# Altium PCB DriveMotorEncoderBoard.PcbDoc
Units mil, origin at the board's own origin, x right, y up, seen from the top; angles counter-clockwise.
Board outline 1000 x 900 mil, 2 copper layers (Top Layer, Bottom Layer); 11 components, 9 nets, 35 pads, 6 vias.
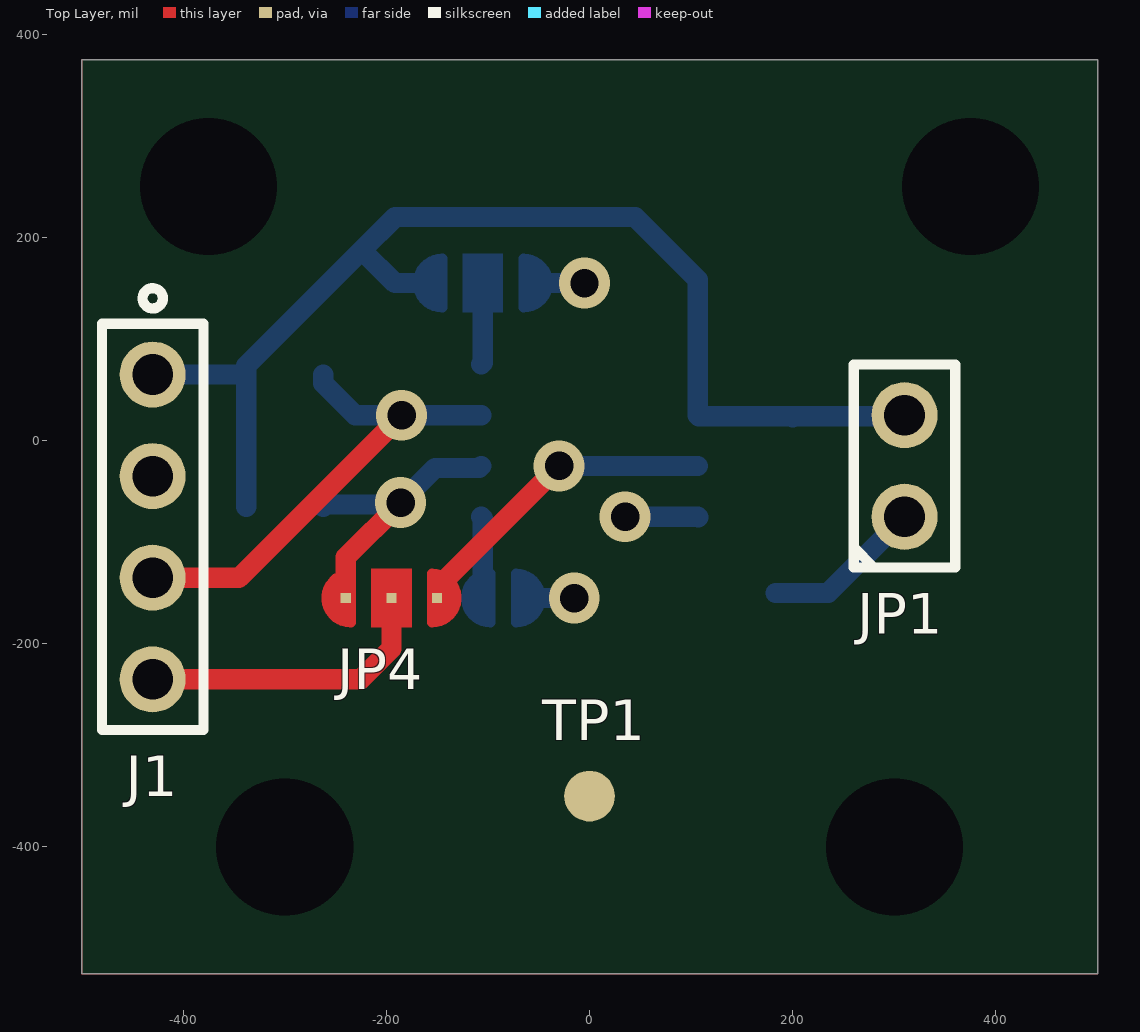
[diagram p0: Top Layer view]
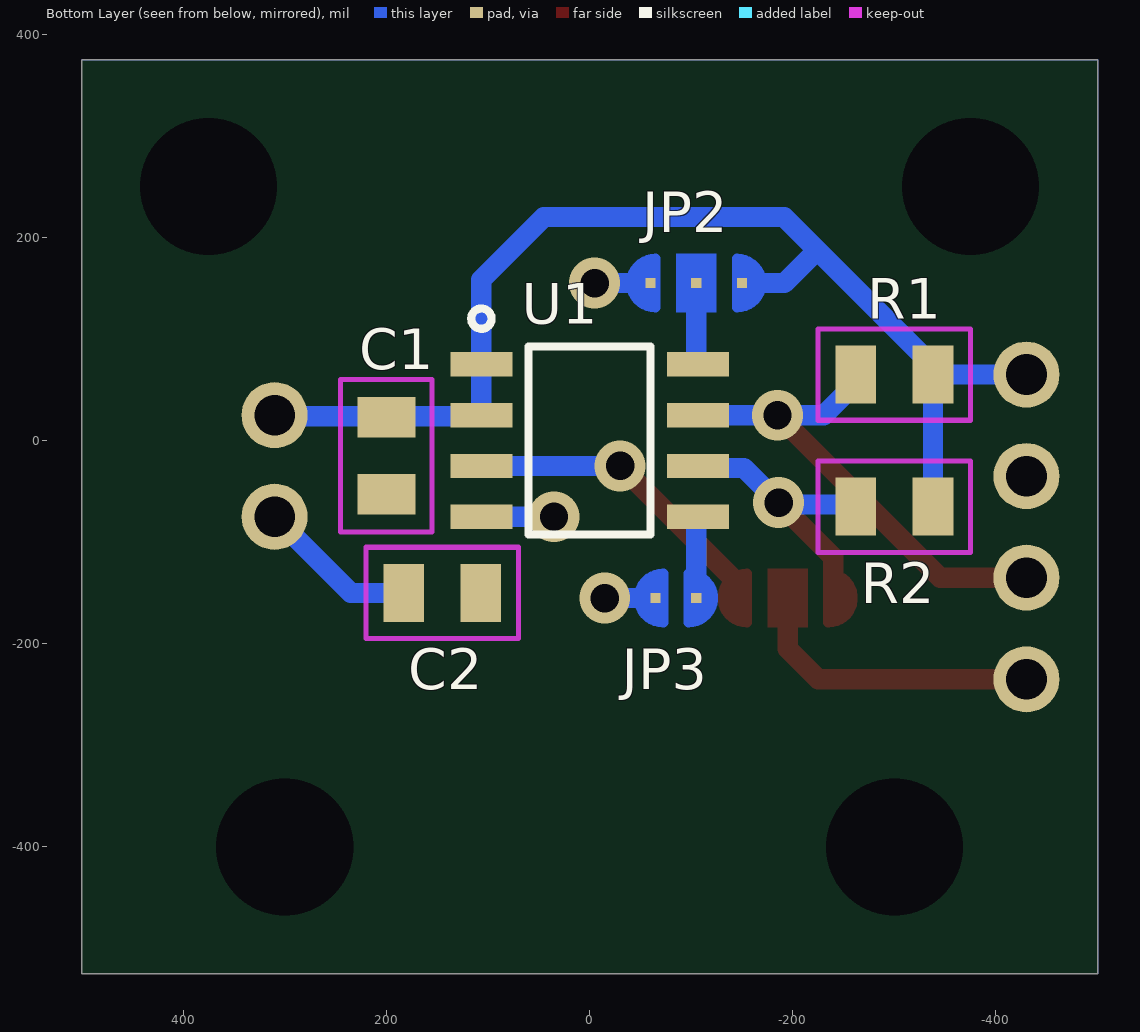
[diagram p1: Bottom Layer view, seen from below]
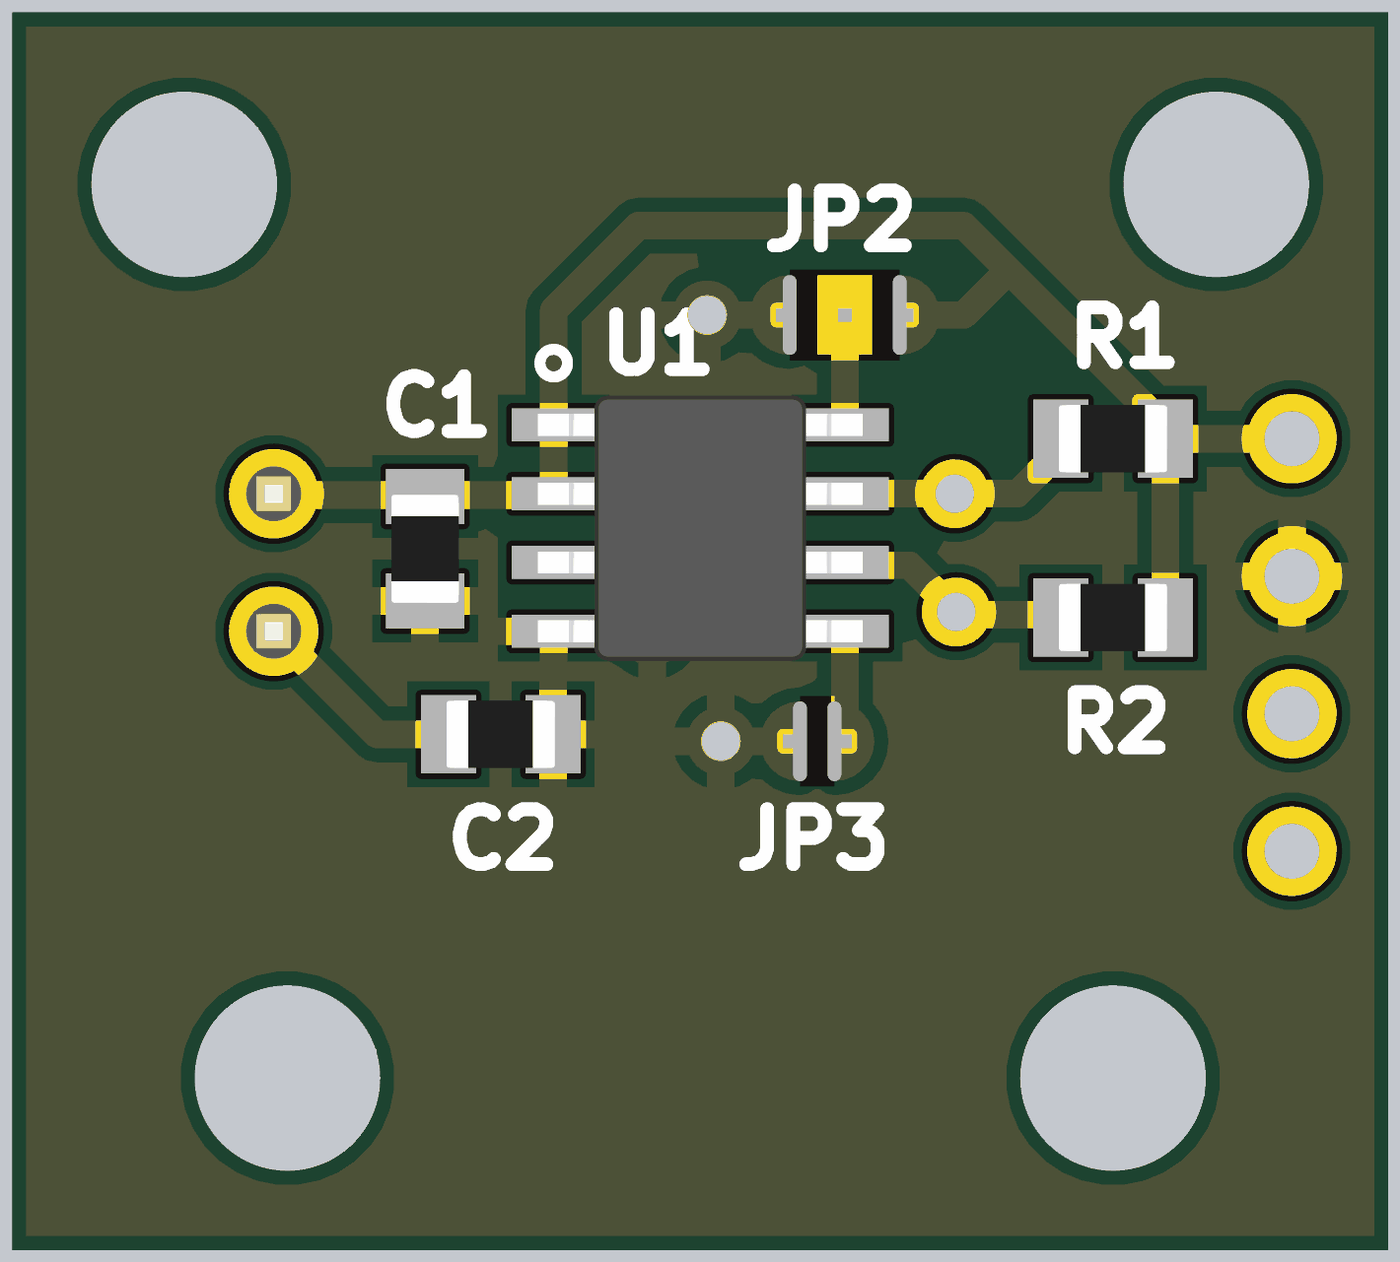
[diagram p2: 3D render of the assembled board from below, using the file's embedded part models]

## Layer stack, top to bottom
Top Solder: solder mask 0.4, Solder Resist, Dk 3.5
Top Layer: signal copper 1.4
Dielectric 1: dielectric 12.6, FR-4, Dk 4.8
Bottom Layer: signal copper 1.4
Bottom Solder: solder mask 0.4, Solder Resist, Dk 3.5

## Board outline
-500,-525 500,-525 500,375 -500,375

## Design rules (kind name [scope] priority, off if disabled: settings)
BoardOutlineClearance [All] p1: gap=10 ignorepadtopadclearanceinfootprint=FALSE except(0: Arc-SplitContinuation Track-SplitContinuation SMDPad-SplitContinuation THPad-SplitContinuation Via-SplitContinuation Fill-SplitContinuation Poly-SplitContinuation Region-SplitContinuation Text-SplitContinuation)
Clearance [All] p1: gap=10 ignorepadtopadclearanceinfootprint=FALSE except(0: Arc-Hole Track-Hole SMDPad-Hole THPad-Hole Via-Hole Fill-Hole Poly-Hole Region-Hole Text-Hole)
HoleSize [All] p1: absolutevalues=TRUE maxlimit=200 minlimit=1 maxpercent=80.000 minpercent=20.000
PolygonConnect [All] p1: connectstyle=Relief reliefconductorwidth=20 reliefentries=4 polygonreliefangle="90 Angle" airgapwidth=10
RoutingVias [All] p1: holewidth=28 width=50 viastyle="Through Hole" minholewidth=28 minwidth=50 maxholewidth=28 maxwidth=50
SolderMaskExpansion [All] p1: expansion=4 istentingtop=FALSE
Width [All] p1: maxlimit=50 minlimit=10 preferedwidth=20 minimp=50.000000 maximp=50.000000 favimp=50.000000
29 further rules are at their usual default settings.

## Components (designator, comment, footprint, x,y, rotation, side; value= is the part's Value field where it differs from the comment)
C1 "100nF" 0805 200,-15 r90 bottom
C2 "10uF" 0805 145,-150 r0 bottom
J1 "Header_4p" BareWire_4p -430,-85 r270 top
JP1 "JumperHeader_0.100\"_2p" "JumperHeader_0.100\"_2p" 310,-25 r90 top
JP2 "SolderJumper_3p" SolderJumper_3p -105,155 r0 bottom
JP3 "SolderJumper_2p" SolderJumper_2p -85,-155 r180 bottom
JP4 "SolderJumper_3p" SolderJumper_3p -195,-155 r180 top
R1 "4.7K" 0805 -300,65 r180 bottom
R2 "4.7k" 0805 -300,-65 r180 bottom
TP1 "TestPoint" TestPoint -30,-360 r90 top
U1 "AS5600-ASOM" SOIC-8 0,0 r180 bottom

## Footprints (in the part's own frame and the unit in brackets; to place one, negate y for a bottom-side part, rotate by r counter-clockwise, add the part's x,y. Pads: shape width x height; smd on the part's side, far side on the other; paste and mask are expansions set on the pad)
0805 [mil]
  rect 40x57 smd: 1(-38,0) 2(38,0)
  Top Layer keep-out lines w5: -75,-45 -75,45 75,45 75,-45 -75,-45
  body extent -40,-25 40,25, height 20
BareWire_4p [mil]
  round 65 hole 40: 1(-150,0) 2(-50,0) 3(50,0) 4(150,0)
  silkscreen extent -235,-50 200,50
"JumperHeader_0.100\"_2p" [mil]
  round 65 hole 40: 1(-50,0) 2(50,0)
  silkscreen extent -100,-50 100,50, body extent -100,-55 100,55, height 330
SOIC-8 [mil] "SOIC-8, 0.154\" (3.9mm) width, Overall L by W 0.193\" by 0.236\" (4.9mm by 6mm)"
  rect 61x24 smd: 1(-106.5,75) 2(-106.5,25) 3(-106.5,-25) 4(-106.5,-75) 5(106.5,-75) 6(106.5,-25) 7(106.5,25) 8(106.5,75)
  silkscreen extent -116,-93 60,130, body extent -118,-97 118,97, height 60
SolderJumper_2p [mil]
  rect 10x10 smd: 1(-20,0) 2(20,0)
  Top Layer lines w10: 12.5,-15 ccw(c12.5,0) 12.5,15 ; 12.5,-6 ccw(c12.5,0) 12.5,6 ; -12.5,-15 cw(c-12.5,0) -12.5,15 ; -12.5,-6 cw(c-12.5,0) -12.5,6 ; 12.5,-24 ccw(c12.5,0) 12.5,24 12.5,-24 ; -12.5,-24 cw(c-12.5,0) -12.5,24 -12.5,-24
SolderJumper_3p [mil]
  rect 10x10 smd: 1(-45,0) 2(0,0) 3(45,0)
  Top Layer region: -20,29 20,29 20,-29 -20,-29
  Top Layer lines w10: -40,15 ccw(c-40,0) -40,-15 ; -40,6 ccw(c-40,0) -40,-6 ; 40,15 cw(c40,0) 40,-15 ; 40,6 cw(c40,0) 40,-6 ; -40,24 ccw(c-40,0) -40,-24 -40,24 ; 40,24 cw(c40,0) 40,-24 40,24
TestPoint [mil]
  round 50 smd: 1(10,-30)

## Part data
C1 C2: library part Capacitor
R1 R2: library part Resistor
U1: "12-bit contactless encoder using diametrically polarized magnet"

## Free pads (board coordinates)
  round 125 hole 135 unplated: MH1(-375,250) MH2(375,250) MH3(300,-400) MH4(-300,-400)

## Via types
v1: diameter 50, hole 28, Top Layer to Bottom Layer, tented both sides, 4 vias
v2: diameter 50, hole 28, Top Layer to Bottom Layer, 2 vias

## Nets (pads, with @x,y where several pads share a name; then routed paths per layer and width w, separated by ;. In a path a pad name is that pad's centre, name@x,y a point inside that pad or via, vN(x,y) a via of type N, cw(c..) or ccw(c..) an arc to the next point about the centre after c; other vN are vias at no path point)
3V3: C1.2 J1.1 JP1.2 JP2.1 R1.2 R2.2 U1.1 U1.2 | length 1187.3
  Bottom Layer w20: J1.1 R1.2 ; R2.2 R1.2 ; JP2.1 -151,155 -160,155 -169,155 -191.5,155 -224,187.5 ; JP1.2 309,24 201,24 C1.2 199,24 107.5,24 U1.2 U1.1 106.5,158.5 45,220 -191.5,220 -224,187.5 ; R1.2 -338,73.5 -224,187.5
DIR: JP2.2 U1.8 | length 80.6
  Bottom Layer w20: U1.8 -105,76.5 JP2.2
GND: C1.1 C2.1 J1.2 JP2.3 JP3.1 TP1.1 U1.4 | length 177.2
  Bottom Layer w20: JP3.1 -57.5,-155 v1(-15,-155) ; JP2.3 -59,155 -50,155 -41,155 v1(-5,155) ; v1(35,-75) U1.4 U1.4@107,-75.5
NetC2_2: C2.2 JP1.1 | length 158.1
  Bottom Layer w20: C2.2 235,-150 JP1.1
NetJ1_4: J1.4 JP4.2 | length 297.4
  Top Layer w20: J1.4 -225,-235 -195,-205 JP4.2
OUT: JP4.1 U1.3 | length 325.2
  Top Layer w20: JP4.1 -149.07,-154.07 -142.93,-147.93 -142.93,-146.1 -142.93,-137.93 ; -142.19,-147.19 -142.19,-137.19 -140.71,-135.71 v1(-30,-25)
  Bottom Layer w20: v1(-30,-25) U1.3
PGO: JP3.2 U1.5 | length 80.6
  Bottom Layer w20: U1.5 -105,-76.5 -105,-132.2 -105,-142.01 JP3.2
SCL: J1.3 R1.1 U1.7 | length 488.3
  Top Layer w20: J1.3 -345,-135 v2(-185,25)
  Bottom Layer w20: R1.1 -262,56.5 -230.5,25 v2(-185,25) U1.7
SDA: JP4.3 R2.1 U1.6 | length 288.4
  Top Layer w20: JP4.3 -240,-151.68 -240,-140.86 -240,-131.53 -240,-115 v2(-186,-61)
  Bottom Layer w20: R2.1 -260,-63 -188,-63 -152,-27 -108.5,-27 U1.6

## Polygon pours and split planes (outlines as drawn)
GND on Top Layer "NONET_L01_P000" (solid, shelved, pour order 0): -500,375 -500,-525 500,-525 500,375
GND on Bottom Layer "NONET_L02_P001" (solid, remove dead copper, shelved, pour order 1): -500,-525 500,-525 500,375 -500,375

## Silkscreen, mask and mechanical layers (free items; w line width, h text height)
Mechanical 1:
  circle w10: c-300,-400 r118
  circle w10: c300,-400 r118
  circle w10: c375,250 r118
  circle w10: c-375,250 r118